# EAGLE board Vince (EAGLE 5.12)
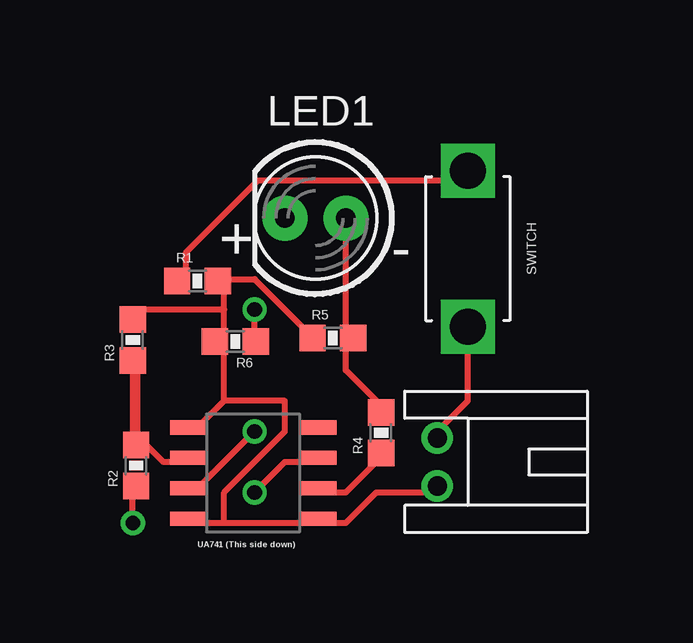
[diagram p0: board, top side]
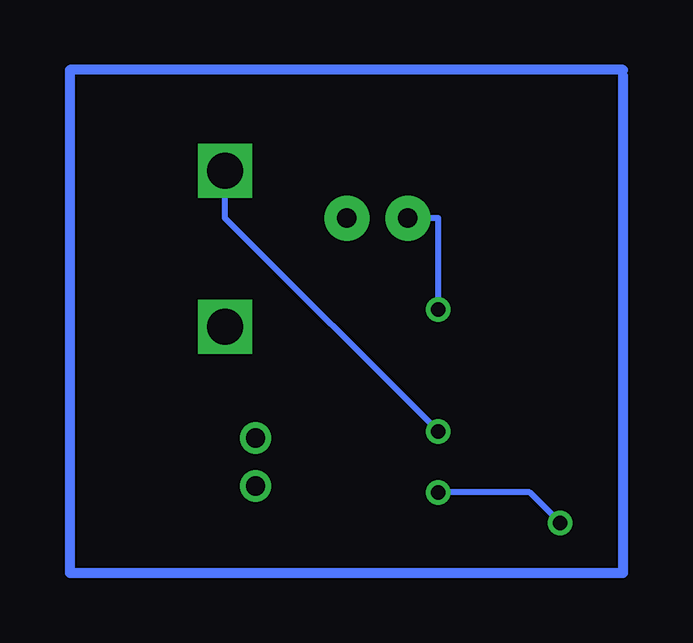
[diagram p1: board, bottom side, seen from below]

No outline drawn. Coordinates in mm, seen from the top.
Copper layers (1*16): Top 0.035mm / dielectric 1.5mm / Bottom 0.035mm
Design rules "default": minimum track width 10mil, minimum drill 24mil, track to track 8mil, track to pad 8mil, pad to pad 8mil, via to via 8mil, smd to smd 8mil, copper to edge 40mil, drill to drill 8mil, minimum pad ring 10mil, minimum via ring 8mil, stop-mask expansion 4mil, vias tented up to drill 0mil, thermal gap 10mil

## Footprints (pad centres in the part's own frame; a part is rotated, then mirrored left to right if it is on the bottom)
LED5MM = drill 0.813 pad 1.88 round: A -1.27,0; K 1.27,0
JST-2-PH-TH = drill 0.8 round: 1 -1,-6.35; 2 1,-6.35
0603 = smd 1.1 x 1.1: 1 -0.85,0; 2 0.85,0
TACTILE_SWITCH = drill 1.5 square: 1 -3.25,0; 2 3.25,0
UA741 = smd 1.55 x 0.6: 1 -2.7,1.905; 2 -2.7,0.635; 3 -2.7,-0.635; 4 -2.7,-1.905; 5 2.7,-1.905; 6 2.7,-0.635; 7 2.7,0.635; 8 2.7,1.905

## Placement (x,y rotation side)
LED1  [LED5MM]  105.41,44.45 180 top
PH-JST-TH  [JST-2-PH-TH]  116.84,34.29 270 top
R1  1K  [0603]  100.49,41.83 0 top
R2  1K  [0603]  97.93,34.14 90 top
R3  1K  [0603]  97.79,39.37 90 top
R4  100  [0603]  108.14,35.5 90 top
R5  1K  [0603]  106.13,39.45 0 top
R6  1K  [0603]  102.07,39.31 180 top
SWITCH  TACTILE_SWITCH  [TACTILE_SWITCH]  111.76,43.18 90 top
UA741(R-PDSO-G8)  UA741  [UA741]  102.81,33.83 0 top

## Library data of the parts
LED1 PH-JST-TH R1-R6 SWITCH = GibbotV5
UA741(R-PDSO-G8) = vince

## Nets
5V: R2.1 UA741(R-PDSO-G8).7
GND: PH-JST-TH.2 R1.2 R3.2 R5.1 R6.2 UA741(R-PDSO-G8).1 UA741(R-PDSO-G8).4 UA741(R-PDSO-G8).5
N$1: PH-JST-TH.1 SWITCH.1
N$2: R1.1 SWITCH.2 UA741(R-PDSO-G8).3
N$3: R2.2 R3.1 UA741(R-PDSO-G8).2
N$4: R4.1 UA741(R-PDSO-G8).6
N$5: LED1.A R4.2 R5.2
N$6: LED1.K R6.1

## Tracks (layer width: path | path; a pad name or v marks a point on that pad's centre or on a via)
5V  (via drill 0.61)
  Top 0.254: v97.79,31.75 97.79,33.02 R2.1 | v102.87,33.02 104.14,34.29 105.41,34.29 UA741(R-PDSO-G8).7
  Bottom 0.254: v97.79,31.75 99.06,33.02 v102.87,33.02
GND
  Top 0.254: 101.6,40.64 101.6,41.91 | 101.6,39.37 101.6,40.64 | 101.6,40.64 97.79,40.64 R3.2 | 101.6,41.91 102.87,41.91 105.41,39.37 R5.1 | 101.6,41.91 R1.2 | 101.6,36.83 100.33,35.56 UA741(R-PDSO-G8).1 | 101.6,36.83 101.6,39.37 | 101.6,39.37 R6.2 | 101.6,31.75 105.41,31.75 | 101.6,31.75 100.33,31.75 UA741(R-PDSO-G8).4 | 105.41,31.75 106.68,31.75 107.95,33.02 110.49,33.02 PH-JST-TH.2 | 105.41,31.75 UA741(R-PDSO-G8).5 | 101.6,36.83 104.14,36.83 104.14,35.56 101.6,33.02 101.6,31.75
N$1
  Top 0.254: PH-JST-TH.1 110.49,35.56 111.76,36.83 SWITCH.1
N$2  (via drill 0.61)
  Top 0.254: v102.87,35.56 100.33,33.02 UA741(R-PDSO-G8).3 | R1.1 100,42 100,43 103,46 111,46 SWITCH.2
  Bottom 0.254: v102.87,35.56 111.76,44.45 SWITCH.2
N$3
  Top 0.254: UA741(R-PDSO-G8).2 100.33,34.29 99.06,34.29 97.79,35.56 R3.1 98,38 98,35 R2.2
N$4
  Top 0.254: R4.1 107.95,34.29 106.68,33.02 105.41,33.02 UA741(R-PDSO-G8).6
N$5
  Top 0.254: 106.68,39.37 106.68,38.1 107.95,36.83 R4.2 | 106.68,39.37 LED1.A | 106.68,39.37 R5.2
N$6  (via drill 0.61)
  Top 0.254: v102.87,40.64 102.87,39.37 R6.1
  Bottom 0.254: v102.87,40.64 102.87,44.45 LED1.K
N$7
  Bottom 0.406: 95.16,50.63 118.24,50.63 118.24,29.67 95.16,29.67 95.16,50.38

## Text on the board
tPlace: + | - | SWITCH | UA741 (This side down)